# EAGLE board Epic Snicket (EAGLE 9.7.0)

Size 201.69 x 89.78 mm. Coordinates in mm from the lower left corner, seen from the top.
Outline: 0,0 201.69,0 201.69,89.78 0,89.78 0,0
Copper layers (1*16): Top 0.035mm / dielectric 1.5mm / Bottom 0.035mm
Design rules "default": minimum track width 6mil, minimum drill 0.35mm, track to track 6mil, track to pad 6mil, pad to pad 6mil, via to via 6mil, smd to smd 6mil, copper to edge 40mil, drill to drill 6mil, minimum pad ring 10mil, minimum via ring 8mil, stop-mask expansion 4mil, vias tented up to drill 0mil, thermal gap 10mil

## Footprints (pad centres in the part's own frame; a part is rotated, then mirrored left to right if it is on the bottom)
BAT_3002 = smd 3.96 x 3.96: N 0,0.65 | smd 5.08 x 5.08: P 12.825,0.65; P1 -12.825,0.65
BATTERY-GENERIC = drill 1.118 pad 3.15 octagon: + 2.54,0; - -2.54,0
LEDRD254W60D565H860B_G = drill 0.981 pad 1.581: 1 -1.27,0; 2 1.27,0
RESAD1016W63L850D250B = drill 0.83 pad 1.43: 1 -5.08,0; 2 5.08,0
SWITCH-MOMENTARY-PTH-6.5MM = drill 1.016 pad 1.88: 1 -3.251,2.261; 2 3.251,2.261; 3 -3.251,-2.261; 4 3.251,-2.261
SWITCH-SPDT-PTH-8.5X3.7MM = drill 1.016 pad 1.88: 1 -2.54,0; 2 0,0; 3 2.54,0

## Placement (x,y rotation side)
BAT1  BR2016  [BAT_3002]  20.19,61.32 0 top
BAT3  BR2016  [BAT_3002]  21.05,15.43 0 top
BAT4  9V  [BATTERY-GENERIC]  143.81,81.52 270 top
D1  GREEN  [LEDRD254W60D565H860B_G]  100.72,43.55 0 top
D3  GREEN  [LEDRD254W60D565H860B_G]  103.99,79.38 90 top
D4  GREEN  [LEDRD254W60D565H860B_G]  110.88,28.31 180 top
D5  GREEN  [LEDRD254W60D565H860B_G]  164.36,38.2 180 top
D6  GREEN  [LEDRD254W60D565H860B_G]  194.7,35.93 180 top
R1  1k  [RESAD1016W63L850D250B]  94.37,43.55 0 top
R3  1k  [RESAD1016W63L850D250B]  143.81,75.17 270 top
S1  SWITCH_MOMENTARY  [SWITCH-MOMENTARY-PTH-6.5MM]  119.33,79.64 0 top
S4  TOGGLE  [SWITCH-SPDT-PTH-8.5X3.7MM]  99.45,51.17 180 top
S5  SWITCH_MOMENTARY  [SWITCH-MOMENTARY-PTH-6.5MM]  162.95,29.58 90 top
S6  SWITCH_MOMENTARY  [SWITCH-MOMENTARY-PTH-6.5MM]  193.43,29.58 90 top

## Library data of the parts
BAT1 BAT3 = Tinkercad; CATEGORY: Battery-Holder; CELL_DIAMETER: 20mm; DESCRIPTION: Battery Retainer Coin, 20.0mm 1 Cell SMD (SMT) Tab; MANUFACTURER: Keystone Electronics; MPN: 3002; PART_STATUS: ACTIVE; ROHS_COMPLIANT: COMPLIANT; SERIES: -; SUB_CATEGORY: Holder; TYPE: Coin Cell
BAT4 R1 R3 S1 S4-S6 = Tinkercad
D1 D3-D6 = Tinkercad; CATEGORY: Opto-Electronic; SUB-CATEGORY: LED; VALUE: LED_GREEN

## Nets
BAT1+: BAT1.P BAT1.P1 R1.1 S4.3
BAT1-: BAT1.N D1.2 S4.1
BAT3+: BAT3.P BAT3.P1 D4.1 D5.1 D6.1 S5.3 S5.4 S6.3 S6.4
BAT3-: BAT3.N D4.2 D5.2 D6.2 S5.1 S5.2 S6.1 S6.2
BAT4+: BAT4.+ R3.1
BAT4-: BAT4.- D3.2 S1.1 S1.2
S1_3: D3.1 R3.2 S1.3 S1.4
S4_P: D1.1 R1.2 S4.2

## Tracks (layer width: path | path; a pad name or v marks a point on that pad's centre or on a via)
BAT1+  (3 unrouted)
BAT1-  (2 unrouted)
BAT3+  (8 unrouted)
BAT3-  (7 unrouted)
BAT4+  (1 unrouted)
BAT4-  (3 unrouted)
S1_3  (3 unrouted)
S4_P  (2 unrouted)